# EAGLE board rj45-adaptor-1-1 (EAGLE 8.4.3)

Size 38 x 35.6 mm. Coordinates in mm from the lower left corner, seen from the top.
Outline: 0,0 38,0 38,35.6 0,35.6 0,0
Copper layers (1*16): Top 0.035mm / dielectric 1.5mm / Bottom 0.035mm
Design rules "default": minimum track width 6mil, minimum drill 0.35mm, track to track 6mil, track to pad 6mil, pad to pad 6mil, via to via 6mil, smd to smd 6mil, copper to edge 40mil, drill to drill 6mil, minimum pad ring 10mil, minimum via ring 8mil, stop-mask expansion 4mil, vias tented up to drill 0mil, thermal gap 10mil

## Footprints (pad centres in the part's own frame; a part is rotated, then mirrored left to right if it is on the bottom)
RJ45-PULSE-E5J88 = drill 0.9 pad 1.422: 1 3.555,2.54; 2 2.535,4.32; 3 1.515,2.54; 4 0.495,4.32; 5 -0.495,2.54; 6 -1.515,4.32; 7 -2.535,2.54; 8 -3.555,4.32 | hole 3.2: 6.35,0; -6.35,0
1X06 = drill 1.016 long: 1 -6.35,0; 2 -3.81,0; 3 -1.27,0; 4 1.27,0; 5 3.81,0; 6 6.35,0

## Placement (x,y rotation side)
J1  RJ45-JACK  [RJ45-PULSE-E5J88]  10.16,8.89 90 top
J2  RJ45-JACK  [RJ45-PULSE-E5J88]  10.16,26.67 90 top
J3  RJ45-JACK  [RJ45-PULSE-E5J88]  33.04,25.81 90 top
J4  RJ45-JACK  [RJ45-PULSE-E5J88]  33.04,10.01 90 top
JP1  [1X06]  19.55,17.78 270 top

## Library data of the parts
J1-J4 = trainlib
JP1 = pinhead

## Nets
ALT1: J1.4 J2.4 J3.4 J4.4 JP1.4
ALT2: J1.5 J2.5 J3.5 J4.5 JP1.5
CANH: J1.1 J2.1 J3.1 J4.1 JP1.1
CANL: J1.2 J2.2 J3.2 J4.2 JP1.2
GND: J1.3 J1.6 J1.7 J2.3 J2.6 J2.7 J3.3 J3.6 J3.7 J4.3 J4.6 J4.7 JP1.3
PWR_POS: J1.8 J2.8 J3.8 J4.8 JP1.6

## Tracks (layer width: path | path; a pad name or v marks a point on that pad's centre or on a via)
ALT1  (4 unrouted)
ALT2  (4 unrouted)
CANH  (4 unrouted)
CANL  (4 unrouted)
GND  (12 unrouted)
PWR_POS  (4 unrouted)